# Altium PCB Main.PcbDoc
Units mil, origin at the board's own origin, x right, y up, seen from the top; angles counter-clockwise.
Board outline 3135 x 1700 mil, 2 copper layers (Top Layer, Bottom Layer); 29 components, 19 nets, 127 pads, 28 vias.
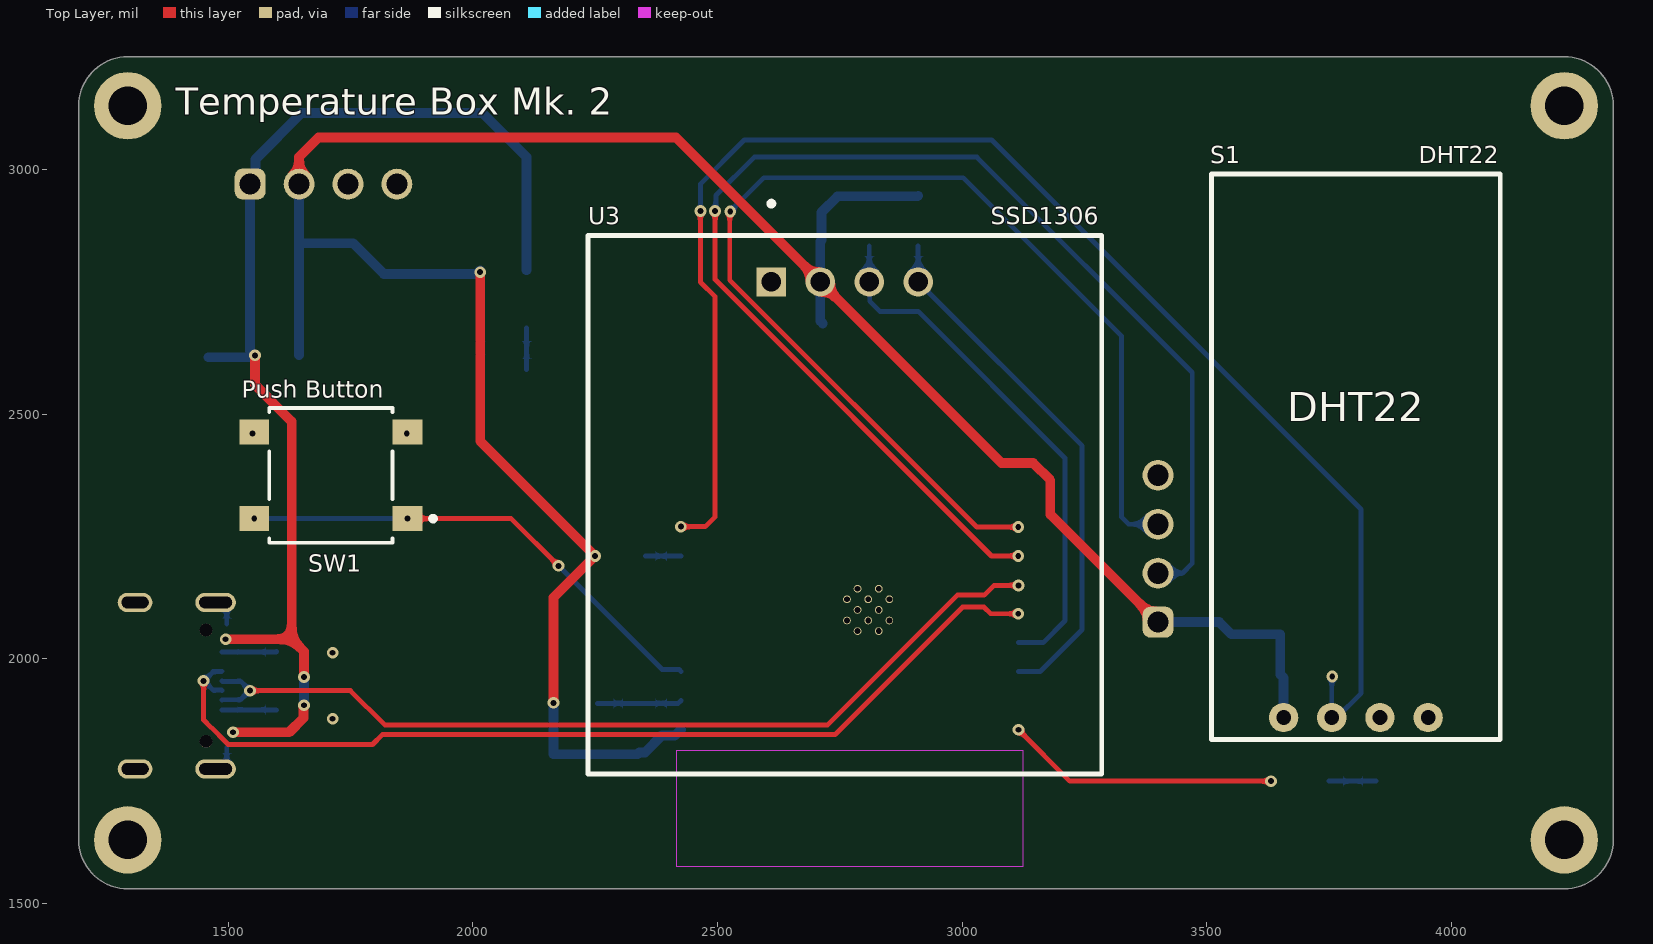
[diagram p0: Top Layer view]
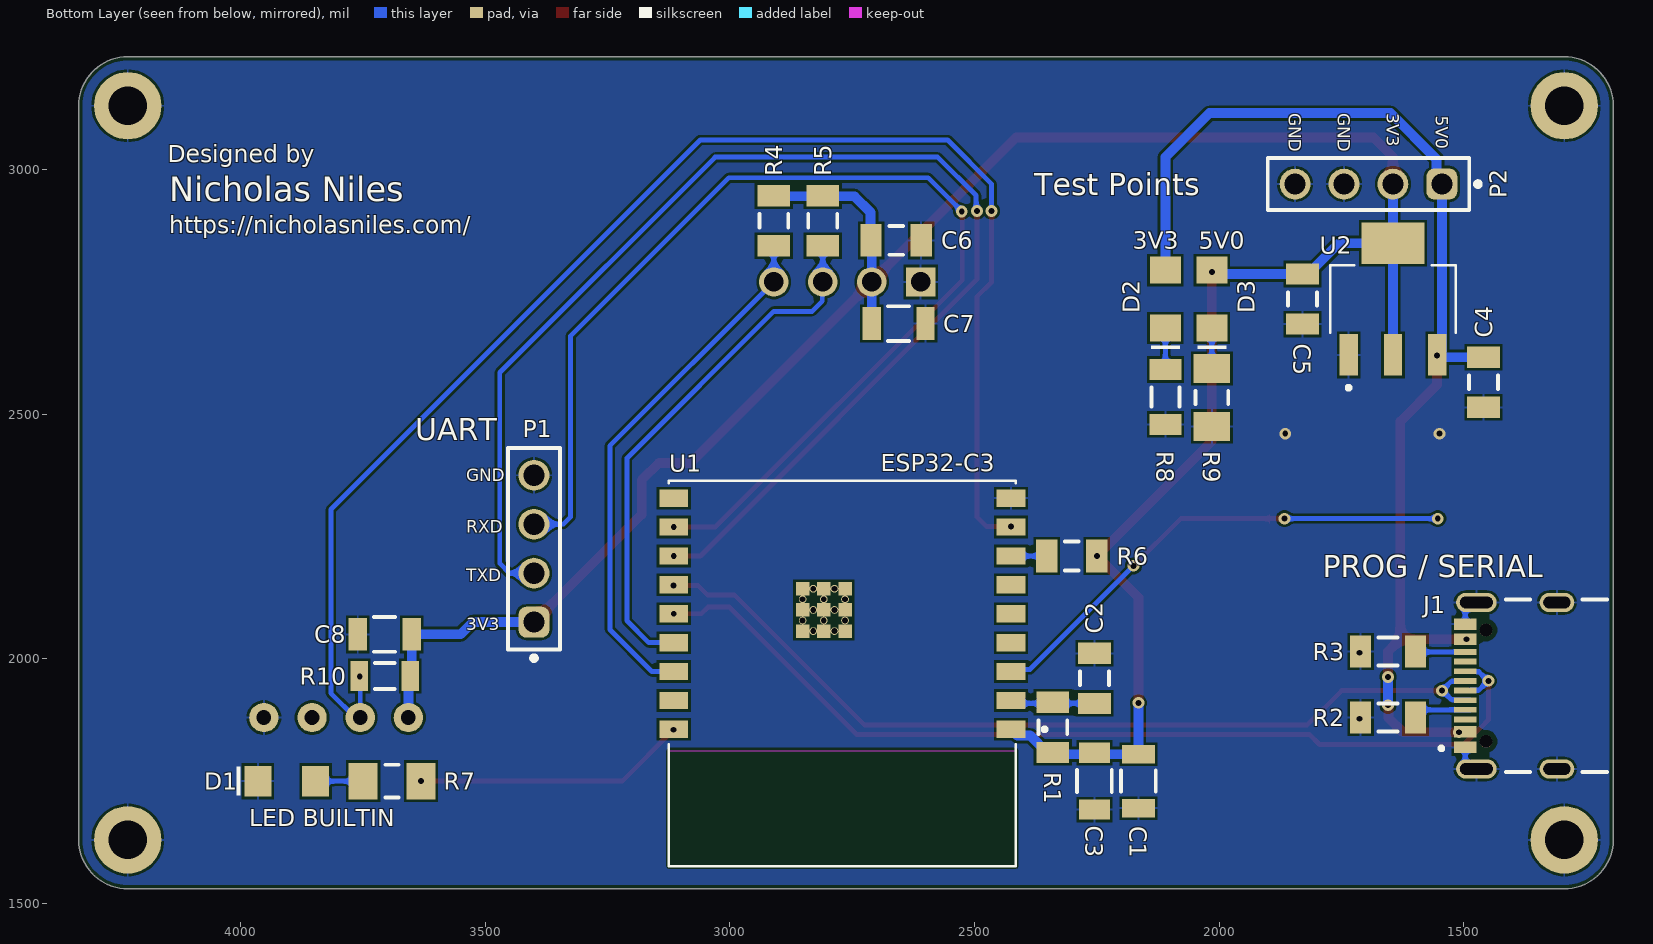
[diagram p1: Bottom Layer view, seen from below]
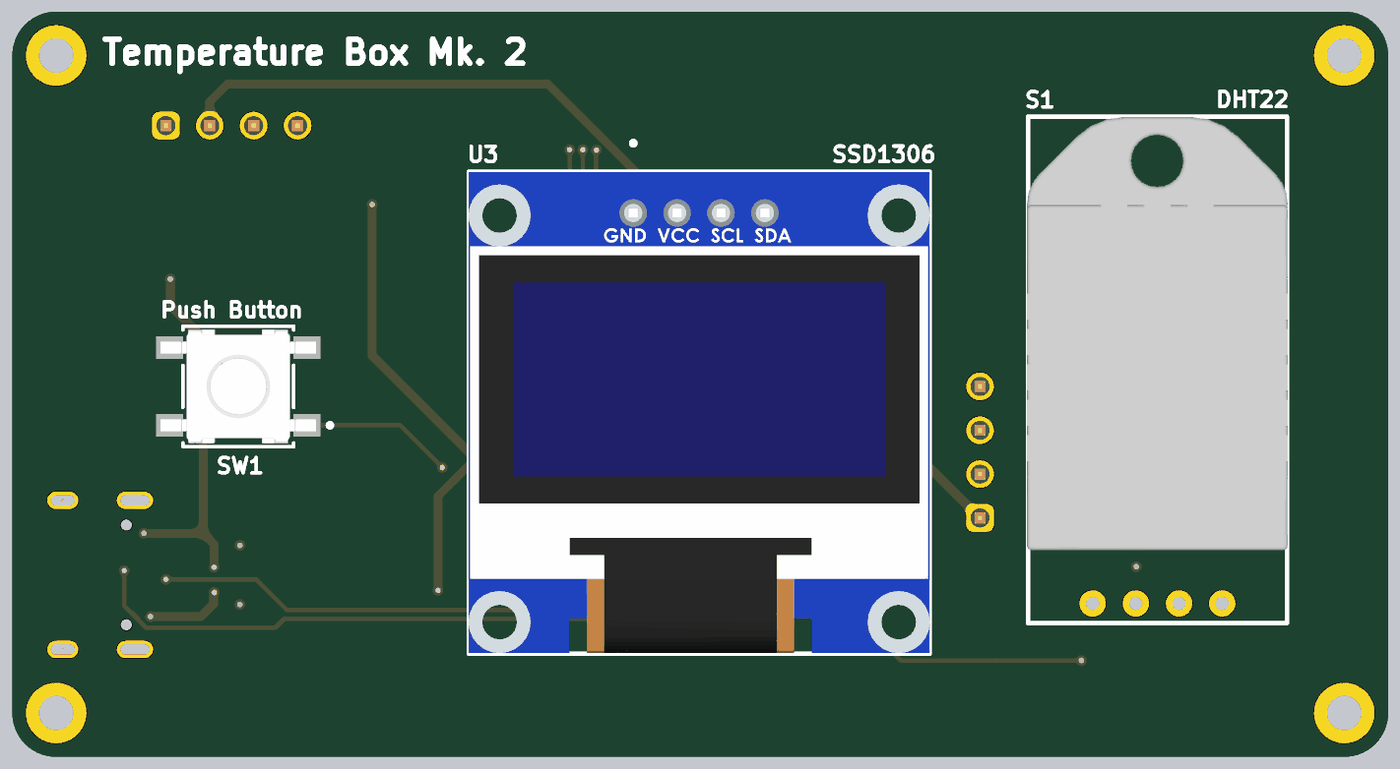
[diagram p2: 3D render of the assembled board from above, using the file's embedded part models]

## Layer stack, top to bottom
Top Solder: solder mask 0.4, Solder Resist, Dk 3.5
Top Layer: signal copper 1.4
Dielectric 1: dielectric 12.6, FR-4, Dk 4.8
Bottom Layer: signal copper 1.4
Bottom Solder: solder mask 0.4, Solder Resist, Dk 3.5

## Board outline
1195,1630 1195,3130 cw(c1295,3130) 1295,3230 4230,3230 cw(c4230,3130) 4330,3130 4330,1630 cw(c4230,1630) 4230,1530 1295,1530 cw(c1295,1630)

## Design rules (kind name [scope] priority, off if disabled: settings)
BoardOutlineClearance [All] p1: gap=7.87 ignorepadtopadclearanceinfootprint=FALSE
Clearance [All] p1: gap=5 ignorepadtopadclearanceinfootprint=TRUE except(10: Arc-Hole Track-Hole SMDPad-Hole THPad-Hole Via-Hole Fill-Hole Poly-Hole Region-Hole Text-Hole)
ComponentClearance [All] p1: gap=5 collisioncheckmode=3 verticalgap=5 showdistances=TRUE
DiffPairsRouting [All] p1: maxlimit=10 minlimit=5 mostfreqgap=5 toplayer_minwidth=5 toplayer_maxwidth=1000 toplayer_prefwidth=5 bottomlayer_minwidth=5 bottomlayer_maxwidth=1000 bottomlayer_prefwidth=5 maxuncoupledlength=500
Height [All] p1: minheight=0 maxheight=71497.94 prefheight=500
HoleSize [All] p1: absolutevalues=TRUE maxlimit=248.03 minlimit=11.81 maxpercent=80.000 minpercent=20.000
HoleToHoleClearance [All] p1: gap=10 allowstackedmicrovias=FALSE
MinimumAnnularRing [All] p1: minimumring=6
MinimumSolderMaskSliver [All] p1: minsoldermaskwidth=6
PlaneClearance [All] p1: clearance=5
PlaneConnect PlaneConnectPowerPads [InPadClass('PowerPads')] p1: planeconnectstyle=Direct reliefexpansion=20 reliefentries=4 reliefconductorwidth=10 reliefairgap=10
PlaneConnect [All] p2: pad.planeconnectstyle=Relief pad.reliefexpansion=11.81 pad.reliefentries=4 pad.reliefconductorwidth=5 pad.reliefairgap=5 via.planeconnectstyle=Direct via.reliefexpansion=11.81 via.reliefentries=4 via.reliefconductorwidth=5 via.reliefairgap=5
PolygonConnect PolygonConnectPowerPads [All vs (InPadClass('PowerPads'))] p1: connectstyle=Direct reliefconductorwidth=10 reliefentries=4 polygonreliefangle="90 Angle" airgapwidth=10
PolygonConnect [All] p2: thpad.connectstyle=Relief thpad.reliefconductorwidth=5 thpad.reliefentries=4 thpad.polygonreliefangle="90 Angle" thpad.airgapwidth=5 smdpad.connectstyle=Relief smdpad.reliefconductorwidth=5 smdpad.reliefentries=4 smdpad.polygonreliefangle="90 Angle" smdpad.airgapwidth=5 via.connectstyle=Direct via.reliefconductorwidth=5 via.reliefentries=4 via.polygonreliefangle="90 Angle" via.airgapwidth=5
RoutingVias [All] p1: holewidth=11.81 width=23.62 viastyle="Through Hole" minholewidth=11.81 minwidth=23.62 maxholewidth=23.62 maxwidth=259.84
SilkToSilkClearance [All] p1: silktosilkclearance=5
SilkToSolderMaskClearance [IsPad] p1: minsilkscreentomaskgap=5 clearancetoexposedcopper=TRUE
SolderMaskExpansion [All] p1: expansion=2 istentingtop=FALSE
UnRoutedNet [All] p1: checkbadconnections=TRUE
Width Width_10mil [All] p1: maxlimit=1000 minlimit=10 preferedwidth=10 minimp=50.000000 maximp=50.000000 favimp=50.000000
Width Width_6mil [All] p2: maxlimit=1000 minlimit=6 preferedwidth=6 minimp=50.000000 maximp=50.000000 favimp=50.000000
Width Power_20mil [All] p3: maxlimit=1000 minlimit=20 preferedwidth=20 minimp=50.000000 maximp=50.000000 favimp=50.000000
Width Power_12mil [All] p4: maxlimit=1000 minlimit=12 preferedwidth=12 minimp=50.000000 maximp=50.000000 favimp=50.000000
Width Width_5mil [All] p5: maxlimit=1000 minlimit=5 preferedwidth=5 minimp=50.000000 maximp=50.000000 favimp=50.000000
19 further rules are at their usual default settings.

## Components (designator, comment, footprint, x,y, rotation, side; value= is the part's Value field where it differs from the comment)
C1 "0.1µF" FP-C1206C-EB-MFG 2165,1750 r270 bottom value="0.10 μF"
C2 "1µF" CAPC3216X110X50LL20T25 2255,1960 r270 bottom
C3 "10µF" FP-GRM31C-0_2-e0_3_0_8-MFG 2255,1750 r270 bottom
C4 "1µF" CAPC3216X110X50LL20T25 1460,2565 r90 bottom
C5 "1µF" CAPC3216X110X50LL20T25 1830,2735 r90 bottom
C6 "1µF" CAPC3216X110X50LL20T25 2660,2855 r0 bottom
C7 "0.1µF" FP-C1206C-EB-MFG 2655,2685 r0 bottom value="0.10 μF"
C8 "0.1µF" FP-C1206C-EB-MFG 3705,2050 r180 bottom value="0.10 μF"
D1 "150120SS75000" WL-SMCW_1206_150120xx75000 3905,1750 r180 bottom
D2 "150120GS75000" WL-SMCW_1206_150120xx75000 2110,2735 r90 bottom
D3 "150120GS75000" WL-SMCW_1206_150120xx75000 2015,2735 r90 bottom
J1 "USB4105-GF-A" GCT_USB4105-GF-A 1310,1945.08 r90 bottom
P1 "61300411121" 61300411121 3400,2225 r90 bottom
P2 "61300411121" 61300411121 1695,2970 r0 bottom
R1 "10kΩ" RESC3216X70X50LL20T25 2340,1860 r90 bottom
R2 "5.1kΩ" RESC3216X70X50NL05T20 1655,1880 r180 bottom
R3 "5.1kΩ" RESC3216X70X50NL05T20 1655,2015 r0 bottom
R4 "10kΩ" RESC3216X70X50LL20T25 2910,2895 r90 bottom
R5 "10kΩ" RESC3216X70X50LL20T25 2810,2895 r90 bottom
R6 "10kΩ" RESC3216X70X50LL20T25 2301.18,2210 r180 bottom
R7 "220Ω" RESC3216X70X50ML20T25 3690,1750 r0 bottom
R8 "330Ω" RESC3216X70X50NL05T20 2110,2535 r270 bottom
R9 "220Ω" RESC3216X70X50ML20T25 2015,2534.06 r270 bottom
R10 "4.7k" RESC3216X70X50LL05T20 3705,1965 r180 bottom
S1 "DHT22" DHT22_Footprint 3804.21,1880 r0 top locked
SW1 "B3S-1000P" FP-B3S-1000P-MFG 1710,2375 r180 top locked
U1 "ESP32-C3-WROOM-02-N4" MODULE_ESP32-C3-WROOM-02-H4 2770,1970 r0 bottom locked
U2 "TLV1117LV33DCYR" VREG_TLV1117LV33DCYR 1645,2735 r90 bottom
U3 "Amazon OLED Display Module" "Amazon OLED Display Module" 2760,2315 r0 top locked

## Footprints (in the part's own frame and the unit in brackets; to place one, negate y for a bottom-side part, rotate by r counter-clockwise, add the part's x,y. Pads: shape width x height; smd on the part's side, far side on the other; paste and mask are expansions set on the pad)
61300411121 [mm] "Pin Header, pitch 2.54 mm, THT, Vertical, single row, 4p"
  rrect50% 1.6x1.6 hole 1.1: 1(-3.81,0)
  round 1.6 hole 1.1: 2(-1.27,0) 3(1.27,0) 4(3.81,0)
  silkscreen extent -5.8,-1.35 5.23,1.35, body extent -5.08,-1.27 5.08,1.27, height 8.57
"Amazon OLED Display Module" [mil] "Hosyond 0.96 Inch OLED I2C Display Module 128x64 Pixel OLED Display"
  rect 60x60 hole 40: 1(-150,455)
  round 60 hole 40: 2(-50,455) 3(50,455) 4(150,455)
  silkscreen extent -525,-550 525,620, body extent -526,-548 526,548, height 198
CAPC3216X110X50LL20T25 [mm] "Chip Capacitor, 2-Leads, Body 3.20x1.60mm, IPC High Density"
  rect 1.1x1.7 smd: 1(-1.3,0) 2(1.3,0)
  silkscreen extent -0.35,-0.75 0.35,0.75, body extent -1.7,-0.9 1.7,0.9, height 1.1
DHT22_Footprint [mil]
  round 60 hole 30: 1(-147.64,0) 2(-49.21,0) 3(49.21,0) 4(147.64,0)
  silkscreen extent -295,-45 295,1111, body extent -297,122 297,1110, height 303
FP-B3S-1000P-MFG [mm]
  rect 1.55x1.3 smd paste+0 mask+0: 1(-3.975,2.25) 2(3.975,2.25) 3(-3.975,-2.25) 4(3.975,-2.25)
  silkscreen extent -5.43,-3.5 3.2,3.5, body extent -4.85,-3.6 4.85,3.6, height 0.25
FP-C1206C-EB-MFG [mm]
  rect 0.95x1.7 smd paste+0 mask+0: 1(-1.4,0) 2(1.4,0)
  silkscreen extent -0.55,-0.9 0.55,0.9, body extent -1.6,-0.8 1.6,0.8, height 0.88
FP-GRM31C-0_2-e0_3_0_8-MFG [mm]
  rect 1.05x1.6 smd paste+0 mask+0: 1(-1.475,0) 2(1.475,0)
  silkscreen extent -0.58,-0.9 0.58,0.9, body extent -1.6,-0.8 1.6,0.8, height 1.8
GCT_USB4105-GF-A [mm]
  rect 0.6x1.15 smd mask+0.05: A1_B12(-3.2,4.755) A4_B9(-2.4,4.755) B1_A12(3.2,4.755) B4_A9(2.4,4.755)
  rect 0.3x1.15 smd mask+0.05: A5(-1.25,4.755) A6(-0.25,4.755) A7(0.25,4.755) A8(1.25,4.755) B5(1.75,4.755) B6(0.75,4.755) B7(-0.75,4.755) B8(-1.75,4.755)
  oval 1x2.1 hole 0.6 slot 1.7 at 90 deg: SH1(-4.32,4.18) SH2(4.32,4.18)
  oval 1x1.8 hole 0.6 slot 1.4 at 90 deg: SH3(-4.32,0) SH4(4.32,0)
  round 0.65 hole 0.65 unplated: ""(-2.89,3.68) ""(2.89,3.68)
  silkscreen extent -4.47,-2.6 4.47,6.1
MODULE_ESP32-C3-WROOM-02-H4 [mm]
  rect 1.5x0.9 smd: 1(-8.75,2.9) 2(-8.75,1.4) 3(-8.75,-0.1) 4(-8.75,-1.6) 5(-8.75,-3.1) 6(-8.75,-4.6) 7(-8.75,-6.1) 8(-8.75,-7.6) 9(-8.75,-9.1) 10(8.75,-9.1) 11(8.75,-7.6) 12(8.75,-6.1) 13(8.75,-4.6) 14(8.75,-3.1) 15(8.75,-1.6) 16(8.75,-0.1) 17(8.75,1.4) 18(8.75,2.9)
  rect 0.7x0.7 smd: 19(-0.14,-2.2) 20(0.96,-2.2) 21(2.06,-2.2) 22(-0.14,-3.3) 23(0.96,-3.3) 24(2.06,-3.3) 25(-0.14,-4.4) 26(0.96,-4.4) 27(2.06,-4.4)
  round 0.4 hole 0.3 mask+0: 28(0.41,-2.2) 29(1.51,-2.2) 30(-0.14,-2.75) 31(0.96,-2.75) 32(2.06,-2.75) 33(0.41,-3.3) 34(1.51,-3.3) 35(-0.14,-3.85) 36(0.96,-3.85) 37(2.06,-3.85) 38(0.41,-4.4) 39(1.51,-4.4)
  Keep-Out Layer region: 9,4 -9,4 -9,10 9,10
  Keep-Out Layer region: 9,4 -9,4 -9,10 9,10
  silkscreen extent -10.6,-10 9,10, body extent -9,-10 9,10, height 3.35
RESC3216X70X50LL05T20 [mm] "Chip Resistor, 2-Leads, Body 3.20x1.60mm, IPC High Density"
  rect 0.9x1.55 smd: 1(-1.325,0) 2(1.325,0)
  silkscreen extent -0.5,-0.67 0.5,0.67, body extent -1.63,-0.82 1.62,0.82, height 0.7
RESC3216X70X50LL20T25 [mm] "Chip Resistor, 2-Leads, Body 3.20x1.60mm, IPC High Density"
  rect 1.1x1.7 smd: 1(-1.3,0) 2(1.3,0)
  silkscreen extent -0.35,-0.75 0.35,0.75, body extent -1.7,-0.9 1.7,0.9, height 0.7
RESC3216X70X50ML20T25 [mm] "Chip Resistor, 2-Leads, Body 3.20x1.60mm, IPC Low Density"
  rect 1.5x1.9 smd: 1(-1.5,0) 2(1.5,0)
  silkscreen extent -0.35,-0.85 0.35,0.85, body extent -1.7,-0.9 1.7,0.9, height 0.7
RESC3216X70X50NL05T20 [mm] "Chip Resistor, 2-Leads, Body 3.20x1.60mm, IPC Medium Density"
  rect 1.1x1.65 smd: 1(-1.425,0) 2(1.425,0)
  silkscreen extent -0.5,-0.72 0.5,0.72, body extent -1.63,-0.82 1.62,0.82, height 0.7
VREG_TLV1117LV33DCYR [mm]
  rect 2.15x0.95 smd: 1(-2.9,2.3) 2(-2.9,0) 3(-2.9,-2.3)
  rect 2.15x3.25 smd: 4(2.9,0)
  silkscreen extent -4.7,-3.25 1.75,3.25, body extent -3.5,-3.25 3.5,3.25, height 1.8
WL-SMCW_1206_150120xx75000 [mm] "SMD Mono-color Chip LED, body 3.2x1.6mm"
  rect 1.4x1.6 smd: 1(-1.5,0) 2(1.5,0)
  silkscreen extent -2.6,-0.75 -2.4,0.75, body extent -1.6,-0.8 1.6,0.8, height 0.68

## Part data
C1 C7 C8: library part CMP-03020-000153-1, "CAP CER 0.1UF 100V X7R 1206", Capacitance="0.10 μF", Manufacturer=KEMET, Manufacturer Part Number=C1206C104K1RACTU, Package=C1206C-EB, Temperature="-55°C to +150°C", Temperature Characteristic=X7R, Temperature Coefficient=15%, Temperature Range High=+150°C, Temperature Range Low=-55°C, Tolerance=0.1, Voltage Rating="100 V", Automotive=Yes, Automotive Grade="Grade 0", Category=Cap, ComponentLink2Description=Datasheet, ComponentLink2URL=https://content.kemet.com/datasheets/KEM_C1007_X8R_ULTRA_150C_SMD.pdf, Device Class L1="Passive Components", Device Class L2=Capacitors, Device Class L3="Ceramic Capacitors", Digikey Description="CAP CER 0.1UF 100V X7R 1206", Height=0.88mm, Ipc Land Pattern Name=CAPC320160X78, Lead Free=Yes, Material=Ceramic, Mouser Description="CAP CER 0.1UF 100V X7R 1206", Octopart=https://octopart.com/c1206c104k1ractu-kemet-89521, RoHS=TRUE
C2 C4 C5 C6: library part CMP-2000-06011-1, "Chip Capacitor, 1 uF, +/- 10%, 50 V, -55 to 125 degC, 1206 (3216 Metric), RoHS, Tape and Reel", Capacitance=1uF, Capacitance - nF=1000nF, Case Code - in=1206, Case Code - mm=3216, Case Height=1mm, Case Length=3.2mm, Case Width=1.6mm, Dielectric=X7R, Manufacturer=Kemet, Maximum Operating Temperature=+125C, Minimum Operating Temperature=-55C, Operating Temperature Range=-55Cto+125C, Package / Case=1206(3216metric), Package Description="2-Pin Surface Mount Device, Body 3.2 x 1.6 mm", Temperature Coefficient / Code=+/-15%, Tolerance=10%, Voltage Rating=50V, Brand=Kemet, Class=Class1, Datasheet URL=http://www.kemet.com/docfinder?Partnumber=C1206C105K5RACTU, Datasheet Version=02/2016, Dimensions=1.6mmWx3.2mmLx1mmH, Factory Pack Quantity=2500, Manufacturer URL=http://www.kemet.com/, Mounting Technology=SurfaceMount, Package Reference=1206, Packaging=Reel, Product=GeneralTypeMLCCs, Product Category=MultilayerCeramicCapacitorsMLCC-SMD/SMT, RoHS=Details, Series=C1206C, Termination Style=SMD/SMT, Type=SMDMLCCX7R6.3-250VDCCommericalGrade, Voltage Rating DC=50V
C3: library part CMP-06035-003589-1, "Chip Multilayer Ceramic Capacitors for General Purpose, 1206, 10uF, X7R, 15%, 10%, 25V", Capacitance=10uF, Case Code (Imperial)=1206, Case Code (Metric)=3216, Dielectric=X7R, Max Operating Temperature=125°C, Min Operating Temperature=-55°C, Package Quantity=1, Tolerance=10%, Voltage=25V, Case/Package=1206, Depth=1.6mm, Height=1.6mm, Lead Free="Lead Free", Length=3.2mm, Material=Ceramic, Mount="Surface Mount", Number of Pins=2, Packaging="Tape and Reel", Radiation Hardening=No, REACH SVHC="No SVHC", Termination=SMD/SMT, Thickness=0.071inch, Voltage Rating=25V, Voltage Rating (DC)=25V, Width=1.6mm
D1: library part CMP-1426-00017-3, "Led, Red, 630 Nm, 1.9 V, 30 Ma, 60 Mcd Rohs Compliant: Yes", Case Code (Imperial)=1206, Case Code (Metric)=3216, Color=Red, Forward Current=100mA, Forward Voltage=1.9V, Max Operating Temperature=85°C, Max Reverse Voltage (DC)=5V, Min Operating Temperature=-40°C, Test Current=20mA, Case/Package=1206, Dominant Wavelength=630nm, Height=680µm, Length=3.2mm, Lens Style="Clear, Rectangular", Luminous Intensity=60mcd, Mount="Surface Mount", Packaging="Tape and Reel", Peak Wavelength=645nm, REACH SVHC=Unknown, RoHS=Compliant, Viewing Angle=140°, Wavelength=630nm, Width=1.6mm
D2 D3: library part CMP-1426-00014-4, "WL-SMCW SMT Mono-Color Chip LED Waterclear", Case Code (Imperial)=1206, Case Code (Metric)=3216, Color=Green, Forward Current=100mA, Forward Voltage=3.2V, Max Junction Temperature (Tj)=95°C, Max Operating Temperature=85°C, Max Reverse Voltage (DC)=5V, Min Operating Temperature=-40°C, Power Dissipation=105mW, Test Current=20mA, Case/Package=1206, Dominant Wavelength=525nm, Height=680µm, Length=3.2mm, Lens Style="Clear, Rectangular", Luminous Intensity=450mcd, Mount="Surface Mount", Packaging="Tape and Reel", Peak Wavelength=515nm, REACH SVHC=Unknown, Reverse Voltage=5V, RoHS=Compliant, Viewing Angle=140°, Wavelength=525nm, Width=1.6mm
J1: Package=None, Availability=Unavailable, MF="{'manufacturer': u'GCT'}", MP=USB4105-GF-A, Price=None
P1 P2: "WR-PHD Pin Header, THT, Vertical, pitch 2.54mm, 1 Row, 4P", Contact Resistance=20mOhm, Manufacturer="Wurth Elektronik", Operating Temperature Max=105°C, Operating Temperature Min=-40°C, Rated Current=3A, Withstanding Voltage=500V, Working Voltage=250V, Category="Board-to-Board Connectors", ComponentLink1Description="Website Link", ComponentLink1URL=https://www.we-online.com/redexpert/article/61300411121?ad, ComponentLink2Description="Datasheet Link", ComponentLink2URL=https://www.we-online.com/redexpert/spec/61300411121?ad, Gender="Pin Header", Manufacturer Part Number=61300411121, Match Code=WR-PHD, Mount="Through Hole", Number of Pins=4, Number of Rows=1, Orientation=Vertical, Packaging=Bag, Pitch=2.54mm
R1 R4 R5 R6: library part CMP-2003-04407-1, Manufacturer=Panasonic, Part Number=ERA8AEB103V
R2 R3: library part CMP-2003-00853-1, Manufacturer=Panasonic, Part Number=ERJ-8ENF5101V
R7 R9: library part CMP-2003-04438-1, Manufacturer=Panasonic, Part Number=ERA8AEB221V
R8: library part CMP-2003-00612-1, Manufacturer=Panasonic, Part Number=ERJ-8GEYJ331V
R10: library part CMP-2003-00848-1, Manufacturer=Panasonic, Part Number=ERJ8ENF4701V
S1: "DHT22 Sensor"
SW1: library part CMP-08834-000008-1, "SWITCH TACTILE SPST-NO 0.05A 24V", Contact Current Rating=50mA, Contact Resistance=100mR, Max Operating Temperature=70°C, Max Voltage Rating (DC)=24V, Min Operating Temperature=-25°C, Operating Force=1.57N, Package Quantity=1, Ratings=IP67, Actuator Length=0.8mm, Actuator Type=Standard, Contact Material=Bronze, Contact Plating=Silver, Current Rating=50mA, Depth=9mm, Electrical Life=500000Cycles, Height=3.65mm, Illumination Type=Non-Illuminated, Lead Free="Lead Free", Length=6.6mm, Max Current Rating=50mA, Mechanical Life=500000Cycles, Mount="Surface Mount", Number of Poles=1, Orientation=Straight, Packaging="Tape and Reel", Radiation Hardening=No, REACH SVHC="No SVHC", Switch Function=Off-Mom, Switch Travel=0.25mm, Termination="Gull Wing", Throw Configuration=SPST, Voltage Rating (DC)=24V, Weight=0.010582oz, Width=6mm
U1: "WiFi Modules (802.11) (Engineering Samples) SMD module, ESP32-C3, 4MB SPI flash, PCB antenna, -40 C +85 C", Package=Package, Availability="In Stock", Check_prices=https://www.snapeda.com/parts/ESP32-C3-WROOM-02-N4/Espressif+Systems/view-part/?ref=eda, MF="Espressif Systems", MP=ESP32-C3-WROOM-02-N4, Price=None, Purchase-URL=https://pricing.snapeda.com/search/part/ESP32-C3-WROOM-02-N4/?ref=eda, SnapEDA_Link=https://www.snapeda.com/parts/ESP32-C3-WROOM-02-N4/Espressif+Systems/view-part/?ref=snap
U2: "1-A, low-dropout voltage regulator", Package="SOT-223-4 Texas Instruments", Check_prices=https://www.snapeda.com/parts/TLV1117LV33DCYR/Texas+Instruments/view-part/?ref=eda, Digi-Key_Part_Number=296-28778-2-ND, MF="Texas Instruments", MP=TLV1117LV33DCYR, Purchase-URL=https://pricing.snapeda.com/search/part/TLV1117LV33DCYR/?ref=eda, SnapEDA_Link=https://www.snapeda.com/parts/TLV1117LV33DCYR/Texas+Instruments/view-part/?ref=snap
U3: library part CMP-00256-A.5, "Hosyond 5 Pcs 0.96 Inch OLED I2C Display Module 128x64 Pixel OLED Display", Amazon Link=https://www.amazon.com/dp/B09C5K91H7?ref=ppx_yo2ov_dt_b_product_details&th=1

## Free pads (board coordinates)
  round 137.79 hole 78.74: 7(1295,1630) 7(1295,3130) 7(4230,1630) 7(4230,3130)

## Via types
v1: diameter 24, hole 12, Top Layer to Bottom Layer, tented both sides, 28 vias

## Nets (pads, with @x,y where several pads share a name; then routed paths per layer and width w, separated by ;. In a path a pad name is that pad's centre, name@x,y a point inside that pad or via, vN(x,y) a via of type N, cw(c..) or ccw(c..) an arc to the next point about the centre after c; other vN are vias at no path point)
3V3: C1.1 C3.1 C5.2 C6.2 C7.2 C8.2 D3.2 P1.1 P2.2 R1.1 R4.2 R5.2 R6.2 R10.2 S1.1 U1.1 U2.2 U2.4 U3.2 | length 5300.2
  Top Layer w20: P2.2 1645,3025 1685,3065 2415,3065 U3.2 3080,2400 3145,2400 3180,2365 3180,2295 P1.1 ; v1(2015,2790) 2015,2445 v1(2250,2210) 2165,2125 v1(2165,1910)
  Bottom Layer w20: U2.2 U2.4 ; P2.2 U2.4 ; D3.2 2007.13,2786.18 C5.2 1818.19,2786.18 1755.2,2849.17 U2.4 ; v1(2165,1910) C1.1 2336.3,1805.12 R1.1 2351.81,1808.82 2386.1,1843.11 2412.8,1843.11 U1.1 ; C7.2@2715.12,2685 2710,2690.12 U3.2 2710,2852.64 2712.36,2855 2712.36,2912.36 2745,2945 2810,2945 2908.82,2945 R4.2 ; P1.1 3525,2075 3550,2050 C8.2 3649.88,1967.95 3656.57,1961.26 S1.1
5V0: C4.2 D2.2 J1.A4_B9 J1.B4_A9 P2.1 U2.3 | length 2435.9
  Top Layer w20: v1(1495,2040) 1630,2040 ; v1(1510,1850) 1625,1850 1654.23,1879.23 1654.23,1904.23 v1(1655,1905) ; v1(1555,2620) 1555,2560 1630,2485 1630,2040 ; v1(1655,1962.78) 1655,2015 1630,2040
  Bottom Layer w20: C4.2 U2.3@1551.18,2616.18 ; v1(1555,2620) 1545,2630 P2.1 1555.75,2980.75 1555.75,3020.75 1650,3115 2020,3115 2110,3025 D2.2 ; v1(1655,1905) v1(1655,1962.78)
D+: J1.A6 J1.B6 U1.14 | length 1978.3
  Top Layer w10: v1(1450,1955) 1450,1875 1465.91,1859.09 1466.39,1859.09 1482.68,1842.81 1482.68,1842.32 1500,1825 1795,1825 1815,1845 2740,1845 3000.86,2105.86 3044.14,2105.86 3057.95,2092.05 v1(3114.49,2092.05)
  Bottom Layer w10: J1.A6@1487.2,1935.16 1486.22,1936.14 1469.33,1936.14 1450.47,1955 v1(1450,1955) 1450.78,1955 1469.48,1973.7 1486.38,1973.7 J1.B6@1487.2,1974.53
D-: J1.A7 J1.B7 U1.13 | length 1848.9
  Top Layer w10: v1(1545,1935) 1750,1935 1820,1865 2725,1865 2990,2130 3045,2130 3065,2150 v1(3115,2150)
  Bottom Layer w10: J1.B7@1487.2,1915.47 1488.19,1916.46 1525.36,1916.46 1543.9,1935 v1(1545,1935) 1544.85,1935 1525.83,1954.02 1488.03,1954.02 J1.A7@1487.2,1954.84
GND: C1.2 C2.1 C3.2 C4.1 C5.1 C6.1 C7.1 C8.1 D1.1 J1.A1_B12 J1.B1_A12 J1.SH1 J1.SH2 J1.SH3 J1.SH4 P1.4 P2.3 P2.4 pad.7 R2.1 R3.2 R8.2 R9.2 S1.4 SW1.3 SW1.4 U1.9 U2.1 U3.1 | length 117.6
  Bottom Layer w10: J1.SH1 1483.64,1775 1497.2,1788.57 J1.A1_B12 ; J1.SH2 1483.64,2115.16 1497.2,2101.59 J1.B1_A12
  other v1: 1713.6,1877.5 1713.6,2012.5 1550,2460 1865,2460
IO0: R7.1 U1.18 | length 559.4
  Top Layer w10: v1(3115,1855) 3220,1750 v1(3630.94,1750)
IO4: SW1.1 SW1.2 U1.3 | length 1001.4
  Top Layer w10: v1(1866.5,2286.42) 2078.58,2286.42 v1(2175,2190)
  Bottom Layer w10: v1(1553.5,2286.42) v1(1866.5,2286.42) ; v1(2175,2190) 2386.84,1978.16 2421.29,1978.16 U1.3
IO9: R10.1 S1.2 U1.8 | length 3012.3
  Top Layer w10: v1(2425,2270) 2475,2270 2495,2290 2495,2740 2465,2770 v1(2465,2915)
  Bottom Layer w10: v1(2465,2915) 2465,2970 2555,3060 3060,3060 3815,2305 3815,1930 3765,1880 S1.2 3755,1962.83 R10.1
  other v1: 3756.08,1963.92
NetC2_2: C2.2 R1.2 U1.2 | length 173
  Bottom Layer w10: C2.2 2340,1908.82 2419.45,1908.82 U1.2
NetD1_2: D1.2 R7.2 | length 96.9
  Bottom Layer w10: R7.2 D1.2
NetD2_1: D2.1 R8.1 | length 84.8
  Bottom Layer w10: R8.1 D2.1
NetD3_1: D3.1 R9.1 | length 82.8
  Bottom Layer w10: R9.1 D3.1
NetJ1_A5: J1.A5 R2.2 | length 112
  Bottom Layer w10: J1.A5@1487.2,1895.79 1598.11,1895.79 R2.2@1598.9,1895
NetJ1_B5: J1.B5 R3.1 | length 112.1
  Bottom Layer w10: J1.B5@1487.2,2013.9 1597.8,2013.9 R3.1
NetR4_1: R4.1 U1.16 U3.4 | length 1088.7
  Bottom Layer w10: R4.1 U3.4 3245,2435 3245,2060 3158.94,1973.94 U1.16
NetR5_1: R5.1 U1.15 U3.3 | length 1091.6
  Bottom Layer w10: R5.1 U3.3 2810.96,2769.04 2810.96,2730.86 2831.82,2710 2910,2710 3210,2410 3210,2077.7 3165.29,2032.99 U1.15
NetR6_1: R6.1 U1.7 | length 73.2
  Bottom Layer w10: R6.1 2425.35,2210 U1.7
RXD: P1.3 U1.11 | length 2351.7
  Top Layer w10: v1(2525.91,2914.09) 2525,2913.18 2525,2773.79 3029.57,2269.21 v1(3114.49,2269.21)
  Bottom Layer w10: v1(2525.91,2914.09) 2594.65,2982.83 3002.17,2982.83 3325,2660 3325,2290 3340,2275 P1.3
TXD: P1.2 U1.12 | length 2682.1
  Top Layer w10: v1(2495,2915) 2495,2775 3059.84,2210.16 v1(3114.49,2210.16)
  Bottom Layer w10: v1(2495,2915) 2496.59,2916.59 2496.59,2946.59 2575,3025 3030,3025 3470,2585 3470,2195 3450,2175 P1.2
pads on no net: J1. J1.A8 J1.B8 S1.3 U1.4 U1.5 U1.6 U1.10 U1.17 U1.19 U1.20 U1.21 U1.22 U1.23 U1.24 U1.25 U1.26 U1.27 U1.28 U1.29 U1.30 U1.31 U1.32 U1.33 U1.34 U1.35 U1.36 U1.37 U1.38 U1.39

## Polygon pours and split planes (outlines as drawn)
GND on Bottom Layer "GND_L02_P000" (solid, pour order 0): 1142.67,3320 4400,3320 4400,1455 1147.34,1455

## Silkscreen, mask and mechanical layers (free items; w line width, h text height)
Top Overlay:
  text "Temperature Box Mk. 2" at 1393,3111.67 h55
  text "DHT22" at 3933,3013 h35
  text "SSD1306" at 3058,2888 h35
  text "Push Button" at 1528,2533 h35
Bottom Overlay:
  text "3V3" at 1657.5,3114.65 h25 r90
  text "GND" at 1757.5,3114.65 h25 r90
  text "GND" at 1857.5,3114.65 h25 r90
  text "5V0" at 1557.5,3109.65 h25 r90
  text "Designed by" at 4148.69,3014.66 h35
  text "Test Points" at 2378,2947 h45
  text "Nicholas Niles" at 4144.89,2935 h50
  text "https://nicholasniles.com/" at 4145.7,2869.66 h35
  text "5V0" at 2042,2838 h35
  text "3V3" at 2177,2838 h35
  text "UART" at 3643,2447 h45
  text "ESP32-C3" at 2692,2383 h35
  text "GND" at 3538.32,2363 h25
  text "RXD" at 3538.32,2258 h25
  text "PROG / SERIAL" at 1788,2167 h45
  text "TXD" at 3538.32,2158 h25
  text "3V3" at 3538.32,2058 h25
  text "LED BUILTIN" at 3982,1658 h35
Mechanical 1:
  the board outline again, w10

## Text inside footprints (layer, text, board x,y; h text height)
J1: Bottom 3D Body "PCB EDGE" at 1211.57,2157.68 h16 r270